# Allegro board TinyBMS.brd
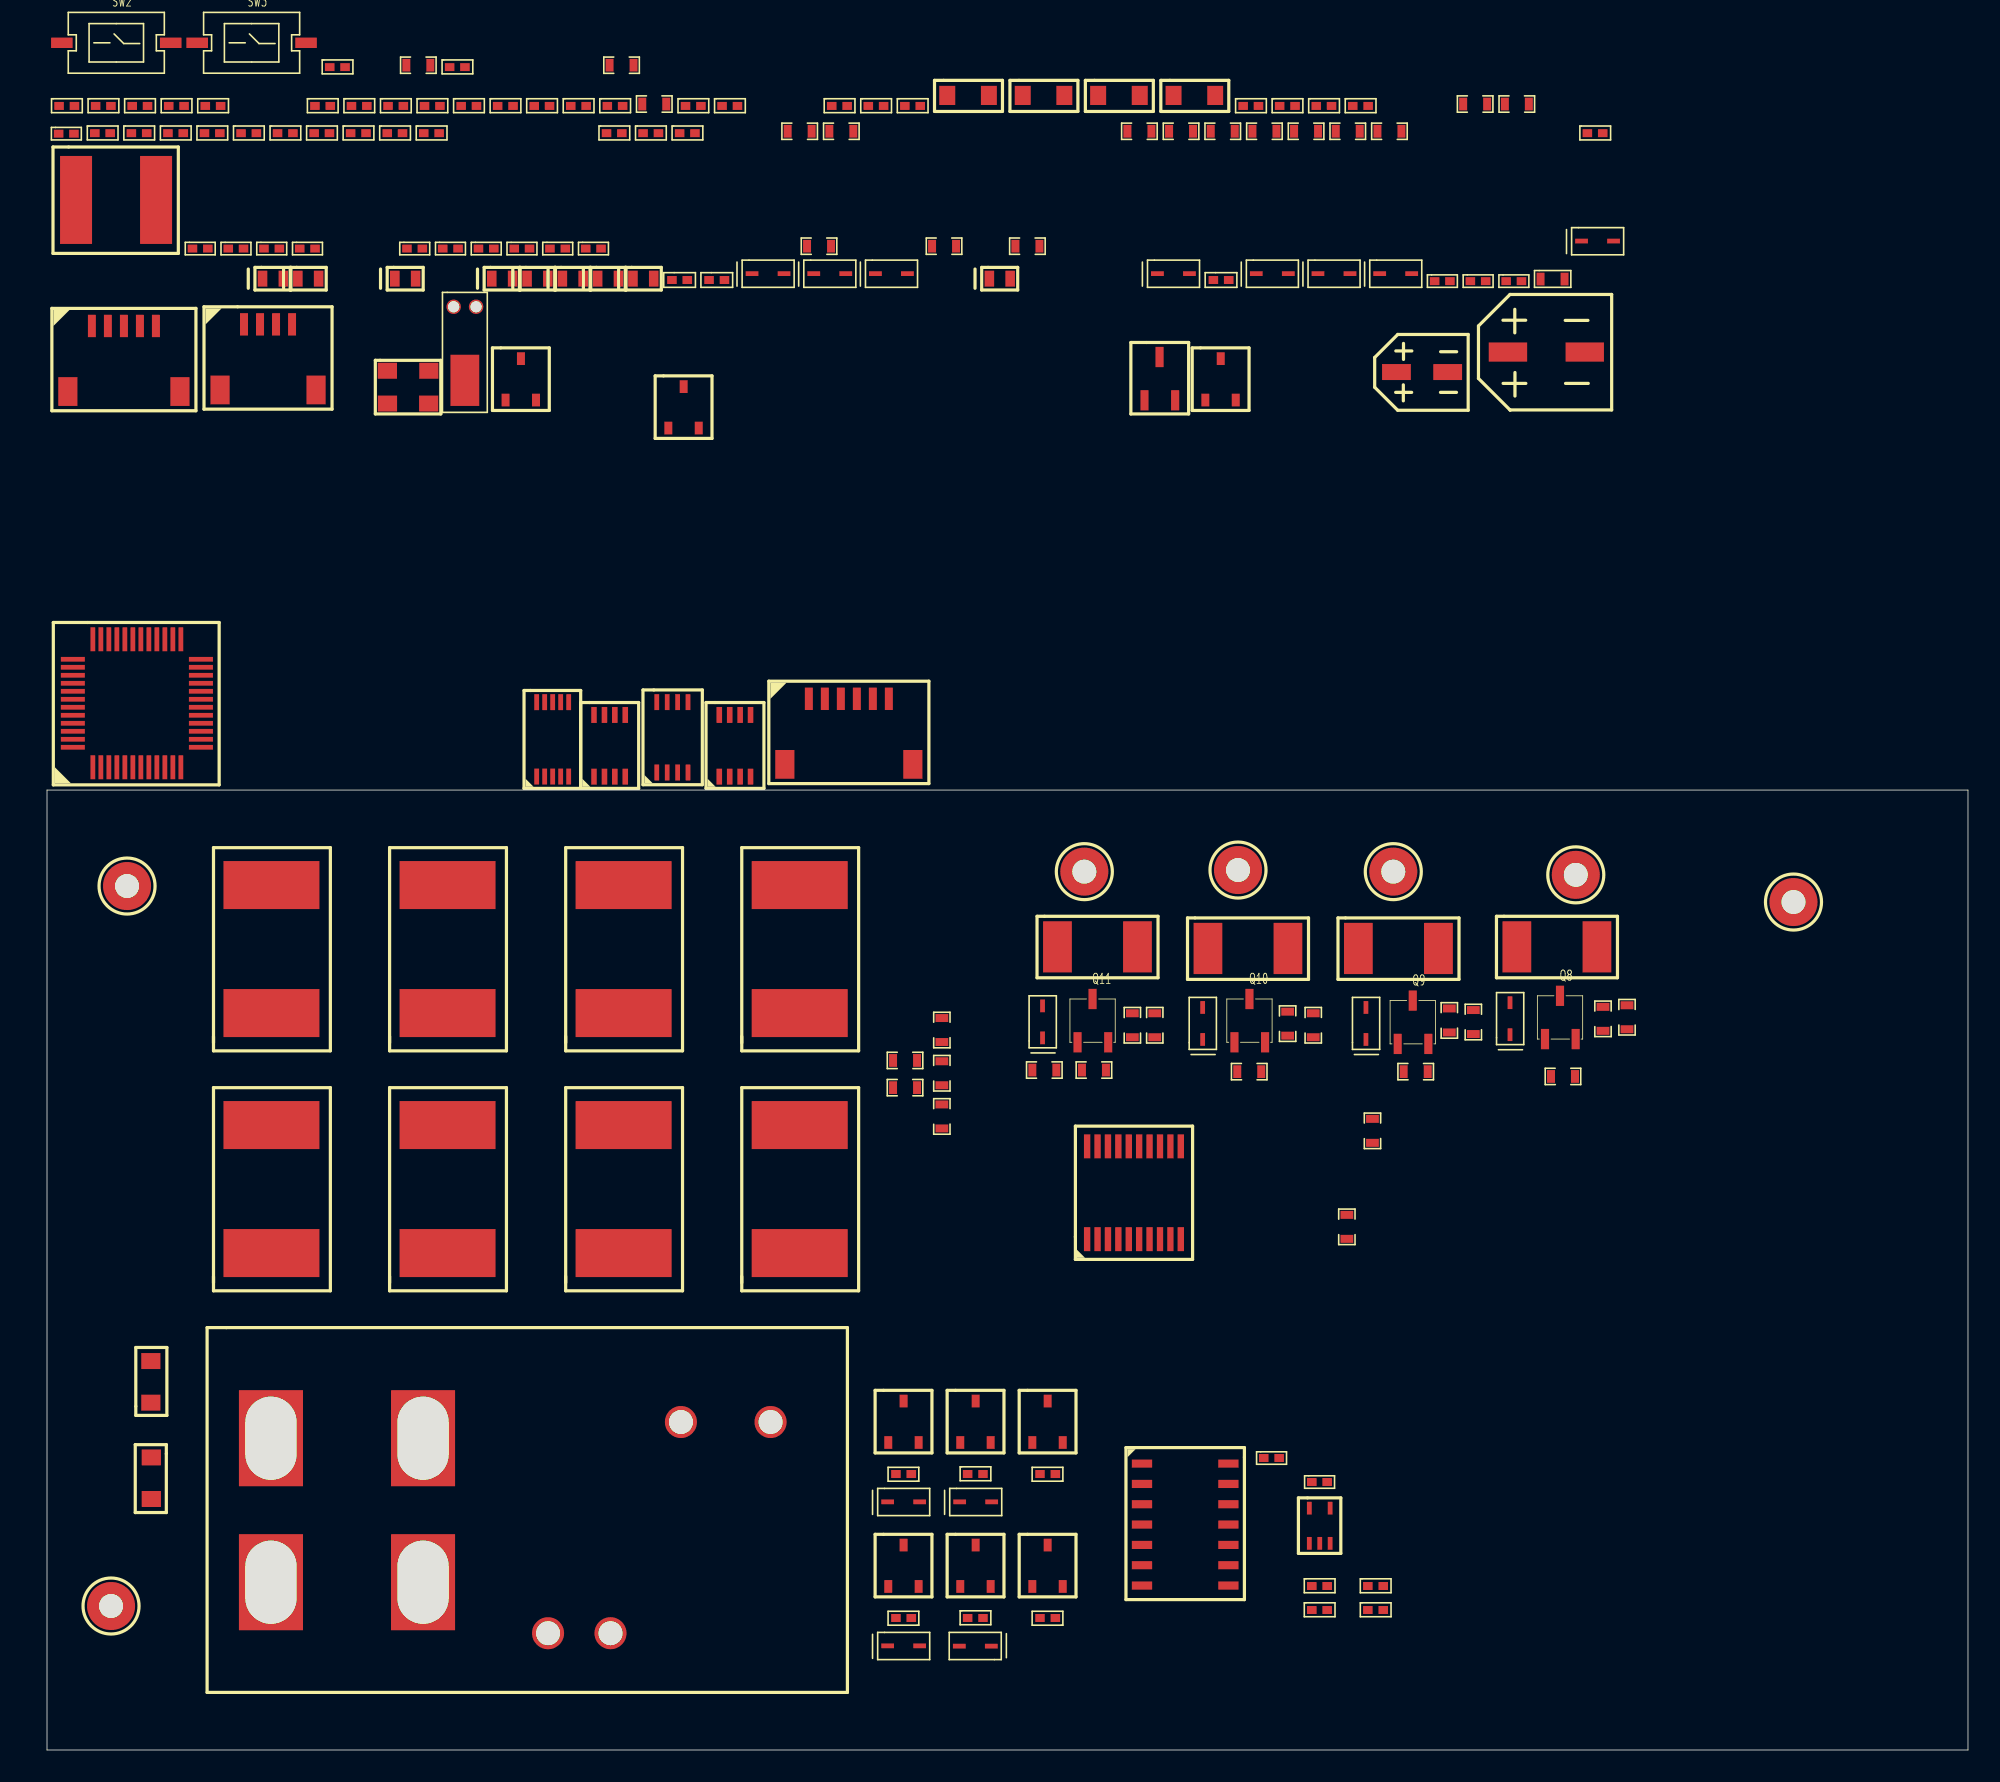
[diagram p0: board, top side]
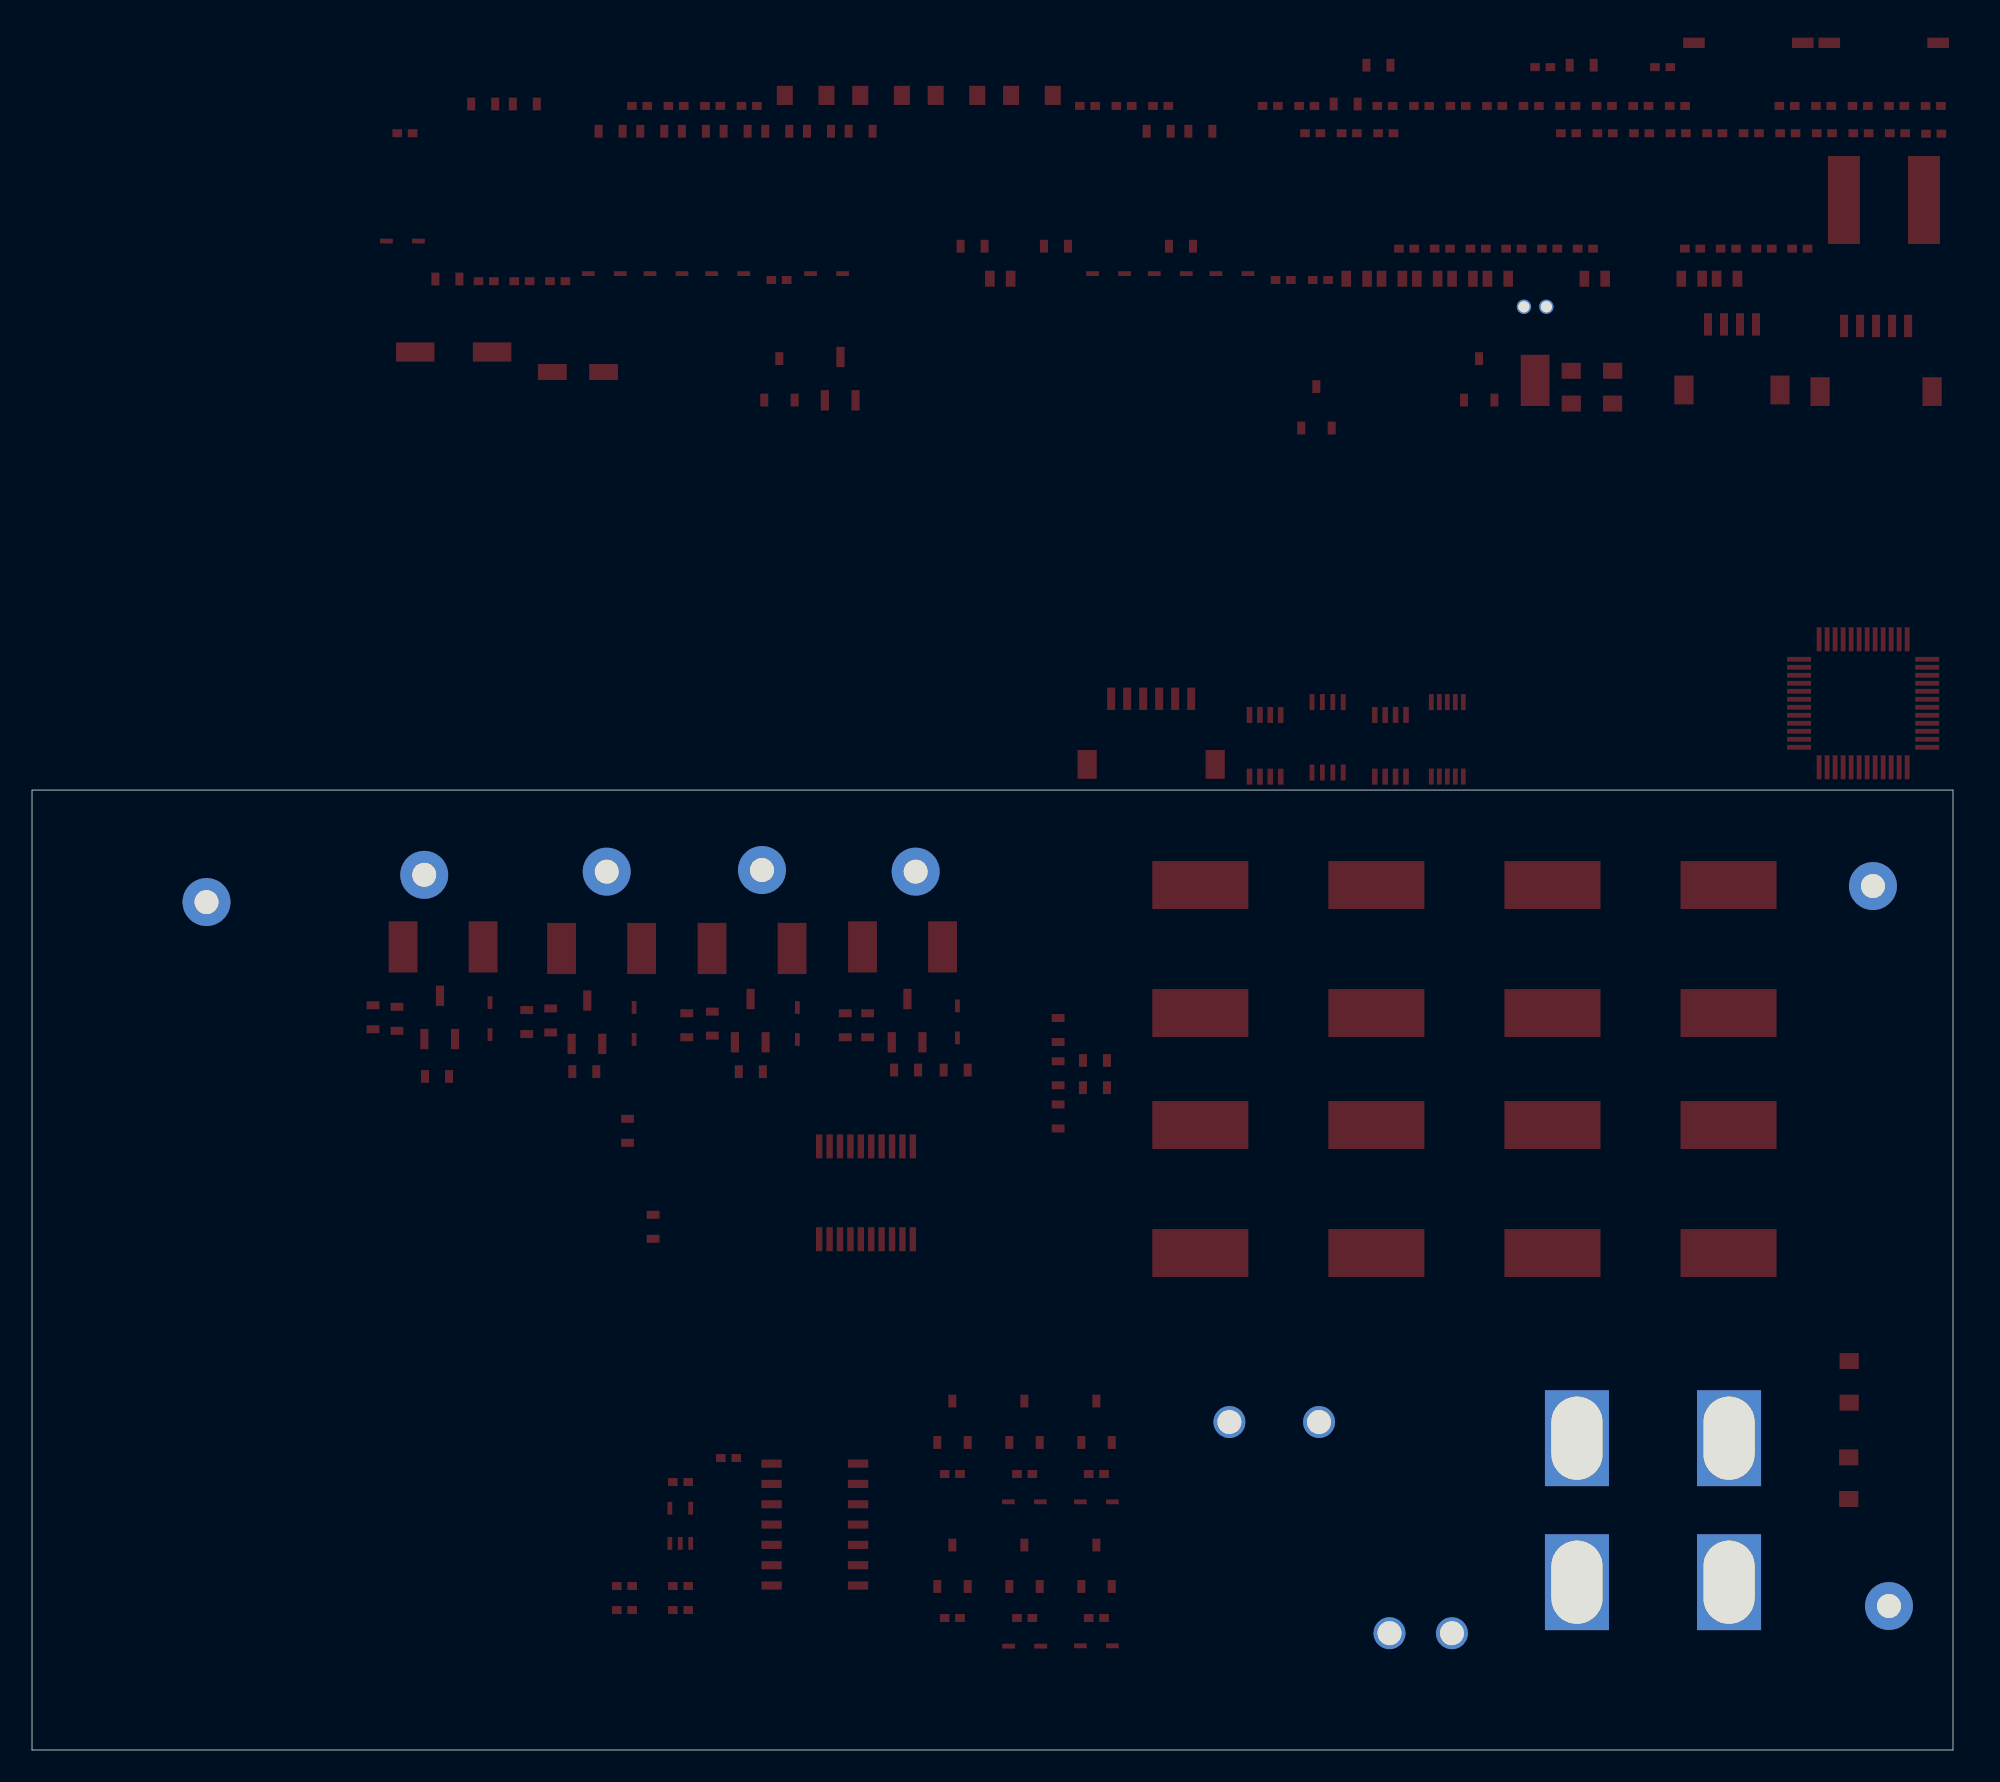
[diagram p1: board, bottom side, seen from below]

Outline 120 x 60 mm; copper layers: TOP, BOTTOM. Coordinates in mm from the lower left corner of the outline.
Outline path: 0,60 0,0 120,0 120,60 0,60

## Design rules (mm)
constraint set DEFAULT: min track width 0.127

## Placement (name value [footprint] x y rotation side)
C1  1uF  [C0603]  95.5 42.5 180 top
C6  0.1uF  [C0603]  55.5 43.1 270 top
C7  0.1uF  [C0603]  55.5 45.8 270 top
C8  0.1uF  [C0603]  55.5 40.4 270 top
C10  1uF/16V  [C0603]  22.4 104.91 0 top
C17  470pF  [C0603]  81.6 31.9 90 top
C18  10uF/6.3V  [C0603]  88.41 102.48 0 top
C19  0.1uF  [C0402]  0.71 100.78 0 top
C24  470pF  [C0603]  35.09 104.91 0 top
C25  12pF  [C0402]  15.78 93.59 0 top
C26  12pF  [C0402]  13.54 93.59 0 top
C27  12pF  [C0402]  11.31 93.59 0 top
C28  12pF  [C0402]  9.08 93.59 0 top
C29  0.1uF  [C0402]  91.14 91.56 0 top
C30  0.1uF  [C0402]  88.91 91.56 0 top
C31  0.1uF  [C0402]  86.67 91.56 0 top
C32  0.1uF  [C0402]  33.64 93.59 0 top
C33  0.1uF  [C0402]  31.41 93.59 0 top
C34  100uF/16V  [SMD-CAP-D6D3XL5D4MM]  93.65 87.39 0 top
C36  0.1uF  [C0402]  29.18 93.59 0 top
C37  0.1uF  [C0402]  26.94 93.59 0 top
C38  0.1uF  [C0402]  24.71 93.59 0 top
C39  0.1uF  [C0402]  22.48 93.59 0 top
C40  DNP  [C1210]  6.5 23 90 top
C41  0.1uF  [C0402]  76 18 0 top
C42  0.1uF  [C0402]  79 16.5 0 top
C43  1uF  [C0603]  86.3 42.8 180 top
C44  1uF  [C0603]  75.9 42.8 180 top
C45  1uF  [C0603]  66.2 42.9 180 top
C46  10uF/35V  [SMD-CAP-D4XL5D4MM]  85.91 86.11 0 top
D1  SD05-7  [SOD-323]  91.4 45.7 90 top
D7  1N4148WS  [SOD-323]  70.36 92.27 0 top
D8  1N4148WS  [SOD-323]  96.85 94.3 0 top
D9  LTVS16H5.0T5G  [DFN1610-2]  35.04 91.96 0 top
D11  LTVS16H5.0T5G  [DFN1610-2]  14.11 91.96 0 top
D14  LTVS16H5.0T5G  [DFN1610-2]  16.32 91.96 0 top
D15  LTVS16H5.0T5G  [DFN1610-2]  37.25 91.96 0 top
D16  LED  [LED0402]  72.85 91.63 0 top
D17  LED  [LED0402]  39.03 91.63 0 top
D18  LED  [LED0402]  41.35 91.63 0 top
D19  1N4148WS  [SOD-323]  45.03 92.27 0 top
D20  NSR0340HT1G  [SOD-323]  76.53 92.27 0 top
D22  1N4148WS  [SOD-323]  48.89 92.27 0 top
D23  1N4148WS  [SOD-323]  52.74 92.27 0 top
D24  1N4148WS  [SOD-323]  58 6.5 180 top
D25  1N4148WS  [SOD-323]  58 15.5 0 top
D26  1N4148WS  [SOD-323]  53.5 6.5 0 top
D27  1N4148WS  [SOD-323]  53.5 15.5 0 top
D28  LTVS16H5.0T5G  [DFN1610-2]  22.37 91.96 0 top
D29  LTVS16H5.0T5G  [DFN1610-2]  59.51 91.96 0 top
D30  LTVS16H5.0T5G  [DFN1610-2]  28.43 91.96 0 top
D31  LTVS16H5.0T5G  [DFN1610-2]  30.64 91.96 0 top
D32  MM3Z4V7T1G  [SOD-323]  80.39 92.27 0 top
D33  MM3Z4V7T1G  [SOD-323]  84.24 92.27 0 top
D34  SD05-7  [SOD-323]  82.4 45.4 90 top
D35  SD05-7  [SOD-323]  72.2 45.4 90 top
D36  SD05-7  [SOD-323]  62.2 45.5 90 top
D37  LTVS16H5.0T5G  [DFN1610-2]  32.84 91.96 0 top
J4  Header1x4  [SMD-HOR-SH1D0-4P]  12.31 89.11 0 top
J6  Header1x6  [SMD-HOR-SH1D0-6P]  47.59 65.7 0 top
J7  Header1x5  [SMD-HOR-SH1D0-5P]  2.8 89.01 0 top
L1  4.7uH  [L0603]  93.25 91.54 0 top
L2  CD54/68uH  [SMD-IND-6X6X4D4MM]  4.22 96.89 0 top
NOREF  -  []  13.99 19.49 0 top
NOREF#2  -  []  23.45 9.66 0 top
NOREF#3  -  []  35.25 20.51 0 top
NOREF#4  -  []  39.55 20.51 0 top
NOREF#5  -  []  47.2 7.25 90 top
NOREF#6  -  []  13.95 9.66 0 top
NOREF#7  -  []  13.99 10.49 90 top
NOREF#8  -  []  10.4 9.66 0 top
NOREF#9  -  []  47.23 4 90 top
NOREF#10  -  []  31.25 9.66 0 top
Q8  FH3400C  [SOT-23-3]  93.1 44 0 top
Q9  FH3400C  [SOT-23-3]  83.9 43.7 0 top
Q10  FH3400C  [SOT-23-3]  73.7 43.8 0 top
Q11  FH3400C  [SOT-23-3]  63.9 43.8 0 top
Q12  FH3400C  [SOT-23]  62.5 11.5 0 top
Q13  FH3400C  [SOT-23]  53.5 11.5 0 top
Q14  FH3400C  [SOT-23]  53.5 20.5 0 top
Q15  FH3400C  [SOT-23]  62.5 20.5 0 top
Q16  FH3400C  [SOT-23]  39.76 83.91 0 top
Q17  FH3415C+  [SOT-23]  58 11.5 0 top
Q18  FH3415C+  [SOT-23]  58 20.5 0 top
Q19  FH3415C+  [SOT-23]  29.6 85.66 0 top
Q20  FH3415C+  [SOT-23]  73.31 85.66 0 top
R1  1K  [R0603]  96.8 46.5 270 top
R6  100  [R0603]  52.8 42.7 0 top
R7  100  [R0603]  52.8 41 0 top
R8  3mR/5W  [LVS3920-1050]  14 50 90 top
R10  1M  [R0603]  55.24 93.59 0 top
R12  2.2K  [R0603]  75.25 100.78 0 top
R14  1M  [R0603]  82.4 39.5 270 top
R16  100  [R0603]  48.82 100.78 0 top
R17  10K  [R0603]  80.46 100.78 0 top
R19  1K  [R0603]  47.43 93.59 0 top
R20  10K  [R0603]  83.06 100.78 0 top
R24  1M  [R0603]  60.44 93.59 0 top
R25  10K  [R0402]  2.98 100.81 0 top
R29  DNP  [R0603]  72.65 100.78 0 top
R31  10K  [R0402]  5.26 100.81 0 top
R37  0  [R0402]  96.21 100.81 0 top
R38  DNP  [R0402]  37.22 100.81 0 top
R39  10K  [R0402]  7.54 100.81 0 top
R40  10K  [R0402]  9.83 100.81 0 top
R41  1K  [R0402]  5.31 102.51 0 top
R43  1K  [R0402]  7.59 102.51 0 top
R44  2K  [R0402]  25.86 102.51 0 top
R45  2K  [R0402]  28.14 102.51 0 top
R46  2K  [R0402]  30.42 102.51 0 top
R47  1M  [R0402]  34.99 102.51 0 top
R48  100K  [R0402]  23.53 100.81 0 top
R50  2K  [R0402]  32.71 102.51 0 top
R51  1K  [R0402]  9.88 102.51 0 top
R52  10K  [R0402]  12.11 100.81 0 top
R53  0  [R0402]  0.74 102.51 0 top
R55  100K  [R0603]  37.13 102.48 0 top
R57  100  [R0402]  39.88 102.51 0 top
R59  100K  [R0402]  54 8.5 180 top
R60  100K  [R0402]  54 17.5 180 top
R61  47K  [R0402]  57.5 8 0 top
R62  47K  [R0402]  57.5 17 0 top
R63  100K  [R0402]  63 8.5 180 top
R64  100K  [R0402]  63 17.5 180 top
R65  1K  [R0402]  79 10 0 top
R66  1K  [R0402]  82.5 10 0 top
R67  1K  [R0402]  16.73 102.51 0 top
R68  1K  [R0402]  19.01 102.51 0 top
R69  1K  [R0402]  21.29 102.51 0 top
R70  1K  [R0402]  23.58 102.51 0 top
R71  365  [R0402]  49.01 102.51 0 top
R72  DNP  [R0402]  39.51 100.81 0 top
R73  0  [R0402]  3.03 102.51 0 top
R74  2.15K  [R0402]  51.29 102.51 0 top
R75  PT100  [R1210]  57.53 103.4 0 top
R76  2.15K  [R0402]  53.58 102.51 0 top
R77  100  [R0402]  42.16 102.51 0 top
R78  10K  [R0402]  14.39 100.81 0 top
R79  237K  [R0402]  74.71 102.51 0 top
R80  10K  [R0402]  17.65 104.94 0 top
R81  237K  [R0402]  76.99 102.51 0 top
R82  PT100  [R1210]  62.24 103.4 0 top
R83  PT100  [R1210]  66.95 103.4 0 top
R84  PT100  [R1210]  71.66 103.4 0 top
R85  15.1K  [R0402]  79.28 102.51 0 top
R86  15.1K  [R0402]  81.56 102.51 0 top
R87  DNP  [R1210]  6.5 17 270 top
R88  2.2K  [R0603]  77.85 100.78 0 top
R89  DNP  [R0402]  79 8.5 0 top
R90  DNP  [R0402]  82.5 8.5 0 top
R91  39  [R2512]  94.3 50.2 0 top
R92  10K  [R0603]  99.1 45 90 top
R93  39  [R2512]  84.4 50.1 0 top
R94  10K  [R0603]  87.2 46.4 270 top
R95  1K  [R0603]  88.7 46.3 270 top
R96  10K  [R0603]  77.9 44.6 90 top
R97  1K  [R0603]  79.5 44.5 90 top
R98  39  [R2512]  75 50.1 0 top
R99  10K  [R0603]  68.2 44.5 90 top
R100  1K  [R0603]  69.6 44.5 90 top
R101  39  [R2512]  65.6 50.2 0 top
R102  1K  [R0603]  61.5 42.1 0 top
R103  10K  [R0402]  16.68 100.81 0 top
R105  10K  [R0402]  25.14 104.94 0 top
R107  100K  [R0402]  18.96 100.81 0 top
R108  DNP  [R0402]  34.94 100.81 0 top
R109  100K  [R0402]  21.24 100.81 0 top
R110  100  [R0603]  46.22 100.78 0 top
R111  3mR/5W  [LVS3920-1050]  25 50 90 top
R112  3mR/5W  [LVS3920-1050]  36 50 90 top
R113  0  [R0603]  67.44 100.78 0 top
R114  DNP  [R0603]  70.04 100.78 0 top
R115  3mR/5W  [LVS3920-1050]  47 50 90 top
R116  3mR/5W  [LVS3920-1050]  14 35 90 top
R117  3mR/5W  [LVS3920-1050]  25 35 90 top
R118  3mR/5W  [LVS3920-1050]  36 35 90 top
R119  3mR/5W  [LVS3920-1050]  47 35 90 top
RL1  -  [HF197F-110]  30 15 0 top
RV1  10K  [R0603]  91.02 102.48 0 top
SW2  BUTTON  [SW-SMD-3D0X6D0-2P]  4.33 106.71 0 top
SW3  BUTTON  [SW-SMD-3D0X6D0-2P]  12.78 106.71 0 top
TP1  BAT-  [TP_THR_CIR_3D0_1D5]  5 54 0 top
TP2  SOLDERING  [TP_THR_CIR_3D0_1D5]  64.8 54.9 0 top
TP3  SOLDERING  [TP_THR_CIR_3D0_1D5]  74.4 55 0 top
TP4  SOLDERING  [TP_THR_CIR_3D0_1D5]  84.1 54.9 0 top
TP5  BAT+  [TP_THR_CIR_3D0_1D5]  95.5 54.7 0 top
TP6  SOLDERING  [TP_THR_CIR_3D0_1D5]  4 9 0 top
TP7  SOLDERING  [TP_THR_CIR_3D0_1D5]  109.1 53 0 top
U1  BQ7692003PWR  [TSSOP-20]  67.9 34.8 90 top
U2  STM32F103CBT6  [LQFP-48]  5.61 65.42 0 top
U4  LM5007MM  [VSSOP-8]  39.08 63.32 0 top
U5  TL431  [SOT-23-3-TL431]  68.08 83.93 0 top
U6  XLV358-MS  [MSOP-8]  42 64.45 0 top
U7  XLV358-MS  [MSOP-8]  34.17 64.45 0 top
U8  RS2255XN  [MSOP-10]  31.58 63.15 0 top
U9  SN74F00DR  [SOIC-14]  68 18.5 270 top
U10  SN74AUP1G00DCKR  [SC-70-5]  79.5 14 0 top
Y3  8MHz  [SMD3225-4P]  22.55 85.18 0 top
Y4  32.768KHz  [DT-26]  25.4 90.21 0 top

## Library data of the parts
C1 C6-C8 C10 C17-C19 C24-C34 C36-C45 = CAP NP
C46 = CAP POL
D1 D34-D36 = DIODE SCHOTTKY
D7 D8 D19 D20 D22-D27 = DIODE
D9 D11 D14 D15 D28-D31 D37 = DIODE TVS
D16-D18 = LED
D32 D33 = DIODE ZENER
J4 = Header1x4
J6 = Header1x6
J7 = Header1x5
L1 L2 = INDUCTOR
Q8-Q11 Q17-Q20 = BSS84
Q12-Q16 = FH3400C
R1 R6-R8 R10 R12 R14 R16 R17 R19 R20 R24 R25 R29 R31 R37-R41 R43-R48 R50-R53 R55 R57 R59-R103 R105 R107-R119 = R
RL1 = Relay
RV1 = VARISTOR
SW2 SW3 = SW PUSHBUTTON
TP1-TP7 = T POINT F
U1 = BQ7692003PWR
U2 = STM32F103CBT6
U4 = LM5007MM
U5 = TL431/TI
U6 U7 = XLV358-MS
U8 = RS2255XN
U9 = SN74F00DR
U10 = SN74AUP1G00DCKR
Y3 = CRYSTAL
Y4 = CRYSTAL-2P

## Footprints (pads in the part's own frame, mm; a bottom-side part is the same pattern mirrored in y, then rotated)
C0402
  rect 0.6x0.5 smd: 1(0.01,0.25) 2(0.97,0.25)
C0603
  rect 0.5x0.8 smd: 1(0.05,0.4) 2(1.55,0.4)
C1210
  rect 1x1.2 smd: 1(-1.289,0.015) 2(1.311,0.015)
DFN1610-2
  rect 0.6x1 smd: 1(-0.647,0.006) 2(0.653,0.006)
DT-26
  round 0.9 hole 0.7: 1(0,0) 2(1.4,0)
  rect 1.8x3.2 smd: 3(0.7,-4.6)
HF197F-110
  round 2 hole 1.5: 1(9.6,5.5) 2(15.2,5.5) 7(1.3,-7.7) 8(5.2,-7.7)
  rect 4x6 hole 3.2x5.2: 3(-6.51,4.488) 4(-6.51,-4.512) 5(-16.01,4.488) 6(-16.01,-4.512)
L0603
  rect 0.5x0.8 smd: 1(0.05,0.4) 2(1.55,0.4)
LED0402
  rect 0.6x0.5 smd: 1(0.01,0.25) 2(0.97,0.25)
LQFP-48
  rect 0.3x1.5 smd: 1(-2.75,-4) 2(-2.25,-4) 3(-1.75,-4) 4(-1.25,-4) 5(-0.75,-4) 6(-0.25,-4) 7(0.25,-4) 8(0.75,-4) 9(1.25,-4) 10(1.75,-4) 11(2.25,-4) 12(2.75,-4) 25(2.75,4) 26(2.25,4) 27(1.75,4) 28(1.25,4) 29(0.75,4) 30(0.25,4) 31(-0.25,4) 32(-0.75,4) 33(-1.25,4) 34(-1.75,4) 35(-2.25,4) 36(-2.75,4)
  rect 1.5x0.3 smd: 13(4,-2.75) 14(4,-2.25) 15(4,-1.75) 16(4,-1.25) 17(4,-0.75) 18(4,-0.25) 19(4,0.25) 20(4,0.75) 21(4,1.25) 22(4,1.75) 23(4,2.25) 24(4,2.75) 37(-4,2.75) 38(-4,2.25) 39(-4,1.75) 40(-4,1.25) 41(-4,0.75) 42(-4,0.25) 43(-4,-0.25) 44(-4,-0.75) 45(-4,-1.25) 46(-4,-1.75) 47(-4,-2.25) 48(-4,-2.75)
LVS3920-1050
  rect 3x6 smd: 1(-3.94,-0.02) 2(4.06,-0.02)
MSOP-8
  rect 0.35x1 smd: 1(-0.001,-3.615) 2(0.649,-3.615) 3(1.299,-3.615) 4(1.949,-3.615) 5(1.949,0.241) 6(1.299,0.241) 7(0.649,0.241) 8(-0.001,0.241)
MSOP-10
  rect 0.3x1 smd: 1(-0.99,-2.31) 2(-0.49,-2.31) 3(0.01,-2.31) 4(0.51,-2.31) 5(1.01,-2.31) 6(1.01,2.34) 7(0.51,2.34) 8(0.01,2.34) 9(-0.49,2.34) 10(-0.99,2.34)
R0402
  rect 0.6x0.5 smd: 1(0.01,0.25) 2(0.97,0.25)
R0603
  rect 0.5x0.8 smd: 1(0.05,0.4) 2(1.55,0.4)
R1210
  rect 1x1.2 smd: 1(-1.289,0.015) 2(1.311,0.015)
R2512
  rect 1.8x3.2 smd: 1(-2.48,-0.002) 2(2.52,-0.002)
SC-70-5
  rect 0.3x0.8 smd: 1(-0.646,-1.085) 2(0.004,-1.085) 3(0.654,-1.085) 4(0.654,1.115) 5(-0.646,1.115)
SMD3225-4P
  rect 1.2x1 smd: 1(-1.285,-1.028) 2(1.29,-1.026) 3(1.297,1.021) 4(-1.29,1.023)
SMD-CAP-D4XL5D4MM
  rect 1.8x1 smd: 1(-1.61,0.02) 2(1.59,0.02)
SMD-CAP-D6D3XL5D4MM
  rect 2.4x1.2 smd: 1(-2.39,-0.01) 2(2.41,-0.01)
SMD-HOR-SH1D0-4P
  rect 0.5x1.4 smd: 1(0,0) 2(1,0) 3(2,0) 4(3,0)
  rect 1.2x1.8 smd: 5(4.5,-4.1) 6(-1.5,-4.1)
SMD-HOR-SH1D0-5P
  rect 0.5x1.4 smd: 1(0,0) 2(1,0) 3(2,0) 4(3,0) 5(4,0)
  rect 1.2x1.8 smd: 6(5.5,-4.1) 7(-1.5,-4.1)
SMD-HOR-SH1D0-6P
  rect 0.5x1.4 smd: 1(0,0) 2(1,0) 3(2,0) 4(3,0) 5(4,0) 6(5,0)
  rect 1.2x1.8 smd: 7(6.5,-4.1) 8(-1.5,-4.1)
SMD-IND-6X6X4D4MM
  rect 2x5.5 smd: 1(-2.41,-0.01) 2(2.59,-0.01)
SOD-323
  rect 0.8x0.3 smd: 1(-0.99,0.01) 2(1.01,0.01)
SOIC-14
  rect 0.51x1.27 smd: 1(0.6,0.4) 2(1.87,0.4) 3(3.14,0.4) 4(4.41,0.4) 5(5.68,0.4) 6(6.95,0.4) 7(8.22,0.4) 8(8.22,5.8) 9(6.95,5.8) 10(5.68,5.8) 11(4.41,5.8) 12(3.14,5.8) 13(1.87,5.8) 14(0.6,5.8)
SOT-23
  rect 0.5x0.8 smd: 1(-0.95,-1.28) 2(0.95,-1.28) 3(0.01,1.31)
SOT-23-3
  rect 0.51x1.27 smd: 1(0.476,0.434) 2(2.391,0.434) 3(1.415,3.142)
SOT-23-3-TL431
  rect 0.51x1.27 smd: 1(0.476,0.434) 2(1.415,3.142) 3(2.391,0.434)
SW-SMD-3D0X6D0-2P
  rect 1.35x0.65 smd: 1(-3.4,0) 2(3.4,0)
TP_THR_CIR_3D0_1D5
  round 3 hole 1.5: 1(0,0)
TSSOP-20
  rect 1.5x0.4 smd: 1(-2.872,2.924) 2(-2.872,2.274) 3(-2.872,1.624) 4(-2.872,0.974) 5(-2.872,0.324) 6(-2.872,-0.326) 7(-2.872,-0.976) 8(-2.872,-1.626) 9(-2.872,-2.276) 10(-2.872,-2.926) 11(2.928,-2.926) 12(2.928,-2.276) 13(2.928,-1.626) 14(2.928,-0.976) 15(2.928,-0.326) 16(2.928,0.324) 17(2.928,0.974) 18(2.928,1.624) 19(2.928,2.274) 20(2.928,2.924)
VSSOP-8
  rect 0.3x1 smd: 1(-0.985,-2.22) 2(-0.335,-2.22) 3(0.315,-2.22) 4(0.965,-2.22) 5(0.965,2.18) 6(0.315,2.18) 7(-0.335,2.18) 8(-0.985,2.18)

## Nets
GND: C7.1 C8.2 C10.2 C17.2 C18.2 C19.1 C24.2 C25.1 C26.1 C27.1 C28.1 C29.2 C30.2 C31.2 C33.2 C34.1 C36.1 C37.1 C38.2 C39.2 C41.2 C42.2 C46.2 D9.2 D11.2 D14.2 D15.2 D16.1(CATHODE) D20.2 D26.2 D27.2 D28.2 D29.2 D30.2 D31.2 D32.2 D33.2 D37.2 J4.4 J4.5 J4.6 J6.5 J6.7 J6.8 J7.3 J7.4 J7.6 J7.7 Q12.2(S) Q13.2(S) Q14.2(S) Q15.2(S) Q16.2(S) Q20.1 R6.1 R8.2 R14.1 R37.2 R48.1 R52.1 R59.1 R60.1 R63.1 R64.1 R72.1 R75.2 R77.1 R82.2 R83.2 R84.2 R86.1 R101.1 R107.1 R109.1 R111.2 R112.2 R115.2 RV1.2 SW3.2 TP1.1(TP) U1.3(VSS) U2.8 U2.23 U2.35 U2.47(VSS_3) U4.4 U5.2 U6.4 U7.4 U8.4 U8.5 U9.7 U10.3 Y3.2 Y3.4 Y4.3
VDD25: R74.2 R76.2 R85.2 U6.1 U6.2
VDD33: C36.2 C37.2 C38.1 C41.1 C42.1 J4.1 L1.1 R17.2 R20.2 R25.2 R29.1 R38.2 R39.2 R40.2 R45.1 R46.1 R53.1 R71.2 R105.2 U2.1 U2.24 U2.36 U2.48 U6.8 U7.8 U8.10 U9.14(VCC) U10.5
VDD168: D24.1(K) D25.1(K) Q17.2(S) Q18.2(S) R61.2 R62.2
ADC1_IN8: R79.2 U2.18 U6.7(OUTB)
BMS_ALERT: C17.1 R14.2 U1.20 U2.38
BMS_ON: R31.1 U2.40
CHG: D33.1(CATHODE) R88.1 R89.2
CTL1: R65.2 U2.21
CTL2: R66.2 U2.22
DSG: D32.1(CATHODE) R12.1 R90.2
EXT_EN: J7.5 R110.2
HCTL1: Q12.1 Q14.1 R60.2 R63.2 U9.6
HCTL2: Q13.1 Q15.1 R59.2 R64.2 U9.11
I2C1_SCL: R17.1 U1.5 U2.45
I2C1_SDA: R20.1 U1.4 U2.46
LED0: D17.1(CATHODE) U2.32
LED1: D18.1(CATHODE) U2.33
MCU_EN: R57.2
MCU_HOLD: U2.39
REGOUT: C18.1 R29.2 R44.2 R108.2 U1.8
SELA: U2.19 U8.7
SELB: U2.20 U8.6
SPI1_MISO: R70.2 U2.16
SPI1_MOSI: R69.2 U2.17
SPI1_NSS: R67.2 U2.14
SPI1_SCK: R68.2 U2.15
SWCLK: D14.1(CATHODE) J4.2 R39.1 U2.37
SWDIO: R41.2 U2.34
TIM1_CH1: U2.29
TIM1_CH1N: U2.26
TIM1_CH2: U2.30
TIM1_CH2N: U2.27
TIM1_CH3: U2.31
TIM1_CH3N: U2.28
USART1_RX: D9.1(CATHODE) J7.1 R105.1 U2.43
USART1_TX: R43.2 U2.42
USART2_RX: U2.13
USART2_TX: U2.12
VC1: C44.2 C45.1 R99.2 R100.2 R103.1 R113.2 U1.16
WAKE_UP: C24.1 D19.1(K) RV1.1 SW2.1 U1.6
N00153: C1.2 C43.1 R94.2 R95.2 U1.13 U1.14
N01121: D34.2(CATHODE) Q9.2(S) R91.1 R95.1 TP4.1(TP)
N02162: C6.1 C7.2 R6.2 U1.18
N02176: C6.2 C8.1 R7.2 U1.19
N02237: R7.1 R87.2 R116.1 R117.1 R118.1 R119.1 RL1.3 RL1.4
N02741: C40.2 R10.1 RL1.5 RL1.6 TP6.1(TP)
N02763: D7.1(K) R10.2 R24.1 R88.2
N03241: Q20.2(S) U1.2
N04366: R12.2 U1.1
N05476: C46.1 R16.2 U1.9 U1.10
N06905: C31.1 D1.2(CATHODE) D8.2 Q8.2(S) R1.1 R19.1 R114.2 TP5.1(TP) TP7.1(TP) U4.8(VIN)
N06945: D8.1(K) R16.1 R19.2
N07349: C10.1 U1.7
N32319: D15.1(CATHODE) J4.3 R40.1 R41.1
N45632: D19.2 R31.2
N60275: C32.2 U4.2
N60407: C32.1 D20.1(K) L2.1 U4.1
N60487: C34.2 L2.2 R50.2 R53.2
N60523: C30.1 U4.7
N60535: R48.2 U4.3
N60543: C33.1 R51.2 R52.2 U4.5
N60675: R50.1 R51.1
N62346: R37.1 R38.1 U2.44
N62530: C26.2 R47.2 U2.6 Y3.1
N62534: C25.2 R47.1 U2.5 Y3.3
N62538: C27.2 U2.4 Y4.1
N62542: C28.2 U2.3 Y4.2
N62840: C19.2 R25.1 U2.7
N62876: C29.1 L1.2 U2.9
N66854: D24.2 D26.1(K) Q13.3 Q17.3 RL1.1
N66902: Q12.3 Q17.1 R61.1
N72236: D25.2 D27.1(K) Q14.3 Q18.3 RL1.2
N76887: Q15.3 Q18.1 R62.1
N86420: D28.1(CATHODE) J6.1 R67.1
N86427: D29.1(CATHODE) J6.2(WR) R68.1
N86434: D30.1(CATHODE) J6.3 R69.1
N86441: D31.1(CATHODE) J6.4 R70.1
N86910: D17.2 R45.2
N86956: D18.2 R46.2
N90859: R71.1 R73.2 U5.3
N95637: R72.2 R73.1 U5.1(REF) U6.3
N97042: R76.1 R77.2 U7.3
N97046: R74.1 U7.5 U8.9
N98736: R78.2 R79.1 U6.6
N98835: R80.2 R81.1 U6.5
N100399: R80.1 U7.6 U7.7(OUTB)
N101244: R78.1 U7.1 U7.2
N105903: R75.1 U8.8
N105907: R82.1 U8.3
N105911: R83.1 U8.1
N105915: R84.1 U8.2(X3)
N115788: C39.1 R81.2 R85.1 R86.2
N129705: D7.2 Q20.3 R24.2
N130360: C40.1 R87.1
N133152: U9.3 U9.4 U9.5
N133196: U9.8 U9.12 U9.13
N137595: U9.2 U9.10 U10.4(Y)
N137612: R65.1 R89.1 U9.1 U10.1
N137616: R66.1 R90.1 U9.9 U10.2
N140319: Q8.3 R91.2
N140441: C1.1 R1.2 R92.2 U1.12
N140869: D1.1 Q8.1 R92.1
N142766: Q9.3 R93.2
N142773: D35.2(CATHODE) Q10.2(S) R93.1 R97.1 TP3.1(TP)
N142879: D34.1 Q9.1 R94.1
N143225: D35.1 Q10.1 R96.1
N143454: C43.2 C44.1 R96.2 R97.2 U1.15
N144047: Q10.3 R98.2
N144054: D36.2(CATHODE) Q11.2(S) R98.1 R100.1 TP2.1(TP)
N144202: D36.1 Q11.1 R99.1
N144572: Q11.3 R101.2 R102.1
N144615: C45.2 R102.2 U1.17
N146314: R103.2 SW2.2
N155464: D11.1(CATHODE) Q16.3 Q19.1 R55.1 R110.1 SW3.1
N155472: Q19.3 R107.2 U4.6
N155484: Q19.2(S) R55.2 R113.1 R114.1
N160866: D22.1(K) D23.1(K) Q16.1 R109.2
N160870: D23.2 R57.1
N160997: D22.2 R108.1
N162969: D16.2 R44.1
N169622: D37.1(CATHODE) J7.2 R43.1
N232879: R8.1 R111.1 R112.1 R115.1 R116.2 R117.2 R118.2 R119.2

Pads without a net: J6 6; RL1 7 8; U1 11; U2 2 10 11 25 41
